# EAGLE board X16-Backplane (EAGLE 9.6.2)

Size 139.7 x 110 mm. Coordinates in mm from the lower left corner, seen from the top.
Outline: 0,0 139.7,0 139.7,110 0,110 0,0
Copper layers (1*16): Top 0.035mm / dielectric 1.5mm / Bottom 0.035mm
Design rules "default": minimum track width 6mil, minimum drill 0.35mm, track to track 6mil, track to pad 6mil, pad to pad 6mil, via to via 6mil, smd to smd 6mil, copper to edge 40mil, drill to drill 6mil, minimum pad ring 10mil, minimum via ring 8mil, stop-mask expansion 4mil, vias tented up to drill 0mil, thermal gap 10mil

## Footprints (pad centres in the part's own frame; a part is rotated, then mirrored left to right if it is on the bottom)
LED-0603 = smd 1 x 1: A -0.877,0; C 0.877,0
PXC-8-RA-1778683 = drill 1 pad 1.7: 1 2.1,7.2; 2 4.6,7.2; 3 7.1,7.2; 4 9.6,7.2; 5 12.1,7.2; 6 14.6,7.2; 7 17.1,7.2; 8 19.6,7.2
SAMTEC_ET60S-D04-3-08-D04-X-R1-S = drill 1.02 square: 01 8.71,-6 | drill 1.02: 02 6.17,-6; 03 3.63,-6; 04 1.09,-6; 05 -1.45,-6; 06 -3.99,-6; 07 -6.53,-6; 08 -9.07,-6; 09 8.71,-3.46; 10 6.17,-3.46; 11 3.63,-3.46; 12 1.09,-3.46; 13 -1.45,-3.46; 14 -3.99,-3.46; 15 -6.53,-3.46; 16 -9.07,-3.46; 17 8.71,-0.92; 18 6.17,-0.92; 19 3.63,-0.92; 20 1.09,-0.92; 21 -1.45,-0.92; 22 -3.99,-0.92; 23 -6.53,-0.92; 24 -9.07,-0.92; P01_1 33.38,5; P01_2 33.38,2.5; P01_3 33.38,0; P01_4 33.38,-2.5; P01_5 33.38,-5; P01_6 30.38,-5; P01_7 30.38,-2.5; P01_8 30.38,0; P01_9 30.38,2.5; P01_10 30.38,5; P02_1 27.88,5; P02_2 27.88,2.5; P02_3 27.88,0; P02_4 27.88,-2.5; P02_5 27.88,-5; P02_6 24.88,-5; P02_7 24.88,-2.5; P02_8 24.88,0; P02_9 24.88,2.5; P02_10 24.88,5; P03_1 22.38,5; P03_2 22.38,2.5; P03_3 22.38,0; P03_4 22.38,-2.5; P03_5 22.38,-5; P03_6 19.38,-5; P03_7 19.38,-2.5; P03_8 19.38,0; P03_9 19.38,2.5; P03_10 19.38,5; P04_1 16.88,5; P04_2 16.88,2.5; P04_3 16.88,0; P04_4 16.88,-2.5; P04_5 16.88,-5; P04_6 13.88,-5; P04_7 13.88,-2.5; P04_8 13.88,0; P04_9 13.88,2.5; P04_10 13.88,5; P05_1 -13.88,5; P05_2 -13.88,2.5; P05_3 -13.88,0; P05_4 -13.88,-2.5; P05_5 -13.88,-5; P05_6 -16.88,-5; P05_7 -16.88,-2.5; P05_8 -16.88,0; P05_9 -16.88,2.5; P05_10 -16.88,5; P06_1 -19.38,5; P06_2 -19.38,2.5; P06_3 -19.38,0; P06_4 -19.38,-2.5; P06_5 -19.38,-5; P06_6 -22.38,-5; P06_7 -22.38,-2.5; P06_8 -22.38,0; P06_9 -22.38,2.5; P06_10 -22.38,5; P07_1 -24.88,5; P07_2 -24.88,2.5; P07_3 -24.88,0; P07_4 -24.88,-2.5; P07_5 -24.88,-5; P07_6 -27.88,-5; P07_7 -27.88,-2.5; P07_8 -27.88,0; P07_9 -27.88,2.5; P07_10 -27.88,5; P08_1 -30.38,5; P08_2 -30.38,2.5; P08_3 -30.38,0; P08_4 -30.38,-2.5; P08_5 -30.38,-5; P08_6 -33.38,-5; P08_7 -33.38,-2.5; P08_8 -33.38,0; P08_9 -33.38,2.5; P08_10 -33.38,5 | hole 3.2: -38.88,0; 38.88,0
SAMTEC-HTST-110-04-X-D-RA = drill 1.02 pad 1.62: 1 11.43,7.874; 2 11.43,5.334; 3 8.89,7.874; 4 8.89,5.334; 5 6.35,7.874; 6 6.35,5.334; 7 3.81,7.874; 8 3.81,5.334; 9 1.27,7.874; 10 1.27,5.334; 11 -1.27,7.874; 12 -1.27,5.334; 13 -3.81,7.874; 14 -3.81,5.334; 15 -6.35,7.874; 16 -6.35,5.334; 17 -8.89,7.874; 18 -8.89,5.334; 19 -11.43,7.874; 20 -11.43,5.334
0603 = smd 1.1 x 1: 1 -0.85,0; 2 0.85,0
16-SOIC = smd 1.97 x 0.6: 1 -2.475,4.445; 2 -2.475,3.175; 3 -2.475,1.905; 4 -2.475,0.635; 5 -2.475,-0.635; 6 -2.475,-1.905; 7 -2.475,-3.175; 8 -2.475,-4.445; 9 2.475,-4.445; 10 2.475,-3.175; 11 2.475,-1.905; 12 2.475,-0.635; 13 2.475,0.635; 14 2.475,1.905; 15 2.475,3.175; 16 2.475,4.445
BACKPLANE_CONNECTORS_BKP = drill 0.79 pad 1.39: 1 -1,-5; 2 1,-5; 3 -1,-3; 4 1,-3; 5 -1,-1; 6 1,-1; 7 -1,1; 8 1,1; 9 -1,3; 10 1,3; 11 -1,5; 12 1,5
CONN_BACKPLANE_ESC_ADAPTER = drill 1.016 pad 1.88: 12V@3 90.424,36.322; 12V@4 90.424,38.862; 12V@5 87.884,36.322; 12V@6 87.884,38.862; 12V@7 85.344,36.322; 12V@8 85.344,38.862; 12V@9 82.804,36.322; 12V@10 82.804,38.862; 12V@11 80.264,36.322; 12V@12 80.264,38.862; GND@1 56.134,38.862; GND@2 56.134,36.322; GND@3 53.594,38.862; GND@4 53.594,36.322; GND@5 51.054,38.862; GND@6 51.054,36.322; GND@7 48.514,38.862; GND@8 48.514,36.322; GND@9 45.974,38.862; GND@10 45.974,36.322; NC@1 19.304,38.862; NC@2 16.764,38.862; NC@3 14.224,38.862; NC@4 11.684,38.862; NC@5 9.144,38.862; NC@6 9.144,36.322; PWM0 19.304,36.322; PWM1 16.764,36.322; PWM2 14.224,36.322; PWM3 11.684,36.322

## Placement (x,y rotation side)
D1  [LED-0603]  -101.6,-191.77 0 top  (outside the outline)
D2  [LED-0603]  -101.6,-195.58 0 top  (outside the outline)
J1  CONN_PXC-8-RA-1778683  [PXC-8-RA-1778683]  1.27,-8.89 0 top
J2  CONN_ET60S-D04-3-08-D04-X-R1-S  [SAMTEC_ET60S-D04-3-08-D04-X-R1-S]  -27.94,-20.32 0 top  (outside the outline)
J3  SAMTEC-HTST-110-04-X-D-RAJ  [SAMTEC-HTST-110-04-X-D-RA]  -83,-221 0 top  (outside the outline)
R1  [0603]  -101.6,-203.2 0 top  (outside the outline)
R2  [0603]  -101.6,-207.01 0 top  (outside the outline)
U1  TRANS_ULN2003AD  [16-SOIC]  -99.06,-181.61 0 top  (outside the outline)
U$1  CONN_BACKPLANE_ESC_CONTROLLERBKP  [BACKPLANE_CONNECTORS_BKP]  -76.2,-22.86 0 top  (outside the outline)
U$2  CONN_BACKPLANE_ESC_ADAPTER  [CONN_BACKPLANE_ESC_ADAPTER]  -93.98,-101.6 0 top  (outside the outline)
U$3  CONN_BACKPLANE_ESC_ADAPTER  [CONN_BACKPLANE_ESC_ADAPTER]  -93.98,-144.78 0 top  (outside the outline)
U$4  CONN_BACKPLANE_ESC_ADAPTER  [CONN_BACKPLANE_ESC_ADAPTER]  -93.98,-187.96 0 top  (outside the outline)

## Library data of the parts
D1 D2 = SparkFun-LED
J1 U$1-U$4 = X16_Backplane
J2 = X16_Backplane; MANUFACTURER: Samtec; MAXIMUM_PACKAGE_HEIGHT: 10 mm; PARTREV: G; STANDARD: Manufacturer Recommendations
J3 = SAMTEC-HTST-110-04-X-D-RA
R1 = SparkFun-Resistors; PROD_ID: 600
R2 = SparkFun-Resistors; PROD_ID: 250
U1 = X16_Backplane; A1_MIN: 0.25; A_MAX: 1.75; A_MIN: 1.75; A_NOM: 1.75; B_MAX: 0.51; B_MIN: 0.33; B_NOM: 0.42; D2_MAX: 0.0; D_MAX: 10.0; D_MIN: 9.8; D_NOM: 9.9; E1_MAX: 4.0; E1_MIN: 3.8; E1_NOM: 3.9; E2_MAX: 0.0; ENOM: 1.27; E_MAX: 6.2; E_MIN: 5.8; E_NOM: 6.0; L_MAX: 1.27; L_MIN: 0.38; L_NOM: 0.825; MANUFACTURER: Diodes Inc.; PIN_COUNT: 16.0; SNAPEDA_PACKAGE_ID: 27538; STANDARD: IPC 7351B

## Nets
5V: J2.P07_1 J2.P07_2 J2.P07_3 J2.P07_4 J2.P07_5 J2.P07_6 J2.P07_7 J2.P07_8 J2.P07_9 J2.P07_10 J2.P08_1 J2.P08_2 J2.P08_3 J2.P08_4 J2.P08_5 J2.P08_6 J2.P08_7 J2.P08_8 J2.P08_9 J2.P08_10 J3.1 U$1.1 U$1.3
12V: D1.A D2.A J2.P01_1 J2.P01_2 J2.P01_3 J2.P01_4 J2.P01_5 J2.P01_6 J2.P01_7 J2.P01_8 J2.P01_9 J2.P01_10 J2.P02_1 J2.P02_2 J2.P02_3 J2.P02_4 J2.P02_5 J2.P02_6 J2.P02_7 J2.P02_8 J2.P02_9 J2.P02_10 U$2.12V@3 U$2.12V@4 U$2.12V@5 U$2.12V@6 U$2.12V@7 U$2.12V@8 U$2.12V@9 U$2.12V@10 U$2.12V@11 U$2.12V@12 U$3.12V@3 U$3.12V@4 U$3.12V@5 U$3.12V@6 U$3.12V@7 U$3.12V@8 U$3.12V@9 U$3.12V@10 U$3.12V@11 U$3.12V@12 U$4.12V@3 U$4.12V@4 U$4.12V@5 U$4.12V@6 U$4.12V@7 U$4.12V@8 U$4.12V@9 U$4.12V@10 U$4.12V@11 U$4.12V@12
12V_GND: J2.P03_1 J2.P03_2 J2.P03_3 J2.P03_4 J2.P03_5 J2.P03_6 J2.P03_7 J2.P03_8 J2.P03_9 J2.P03_10 J2.P04_1 J2.P04_2 J2.P04_3 J2.P04_4 J2.P04_5 J2.P04_6 J2.P04_7 J2.P04_8 J2.P04_9 J2.P04_10 U$2.GND@1 U$2.GND@2 U$2.GND@3 U$2.GND@4 U$2.GND@5 U$2.GND@6 U$2.GND@7 U$2.GND@8 U$2.GND@9 U$2.GND@10 U$3.GND@1 U$3.GND@2 U$3.GND@3 U$3.GND@4 U$3.GND@5 U$3.GND@6 U$3.GND@7 U$3.GND@8 U$3.GND@9 U$3.GND@10 U$4.GND@1 U$4.GND@2 U$4.GND@3 U$4.GND@4 U$4.GND@5 U$4.GND@6 U$4.GND@7 U$4.GND@8 U$4.GND@9 U$4.GND@10
12V_L: J1.1 J1.2 U1.9
CS: J3.20 U$1.11
CTRL: J2.17 J3.7
DGND: J2.18 J3.9
GND: J1.7 J1.8 J2.P05_1 J2.P05_2 J2.P05_3 J2.P05_4 J2.P05_5 J2.P05_6 J2.P05_7 J2.P05_8 J2.P05_9 J2.P05_10 J2.P06_1 J2.P06_2 J2.P06_3 J2.P06_4 J2.P06_5 J2.P06_6 J2.P06_7 J2.P06_8 J2.P06_9 J2.P06_10 J3.3 R1.1 R2.1 U1.8 U$1.2 U$1.4
GPIO1: J3.2 U1.1
GPIO2: J3.4 U1.2
GPIO3: J3.6 U1.3
GPIO4: J3.8 U1.4
MISO: J3.14 U$1.5
MOSI: J3.16 U$1.7
N$1: D1.C R1.2
N$5: D2.C R2.2
N$11: U$2.NC@1 U$2.NC@2 U$2.NC@3 U$2.NC@4 U$2.NC@5 U$2.NC@6
N$16: U$3.NC@1 U$3.NC@2 U$3.NC@3 U$3.NC@4 U$3.NC@5 U$3.NC@6
N$21: U$4.NC@1 U$4.NC@2 U$4.NC@3 U$4.NC@4 U$4.NC@5 U$4.NC@6
PWM1: U$1.6
PWM2: U$1.8
PWM3: U$1.10
PWM4: U$1.12
PWMA0: U$2.PWM0
PWMA1: U$2.PWM1
PWMA2: U$2.PWM2
PWMA3: U$2.PWM3
PWMB0: U$3.PWM0
PWMB1: U$3.PWM1
PWMB2: U$3.PWM2
PWMB3: U$3.PWM3
PWMC0: U$4.PWM0
PWMC1: U$4.PWM1
PWMC2: U$4.PWM2
PWMC3: U$4.PWM3
SA0: J2.23 J3.19
SA1: J2.22 J3.17
SALERT: J2.20 J3.13
SCL: J2.21 J3.15
SCLK: J3.18 U$1.9
SDA: J2.19 J3.11
SOL1_1: J1.3 U1.16
SOL2_1: J1.4 U1.15
SOL3_1: J1.5 U1.14
SOL4_1: J1.6 U1.13

## Tracks (layer width: path | path; a pad name or v marks a point on that pad's centre or on a via)
5V  (22 unrouted)
12V  (51 unrouted)
12V_GND  (49 unrouted)
12V_L  (2 unrouted)
CS  (1 unrouted)
CTRL  (1 unrouted)
DGND  (1 unrouted)
GND  (27 unrouted)
GPIO1  (1 unrouted)
GPIO2  (1 unrouted)
GPIO3  (1 unrouted)
GPIO4  (1 unrouted)
MISO  (1 unrouted)
MOSI  (1 unrouted)
N$1  (1 unrouted)
N$5  (1 unrouted)
N$11  (5 unrouted)
N$16  (5 unrouted)
N$21  (5 unrouted)
SA0  (1 unrouted)
SA1  (1 unrouted)
SALERT  (1 unrouted)
SCL  (1 unrouted)
SCLK  (1 unrouted)
SDA  (1 unrouted)
SOL1_1  (1 unrouted)
SOL2_1  (1 unrouted)
SOL3_1  (1 unrouted)
SOL4_1  (1 unrouted)